# Altium PCB PIC0_D4_SD_card_T3.PcbDoc (part 2 of 2)
Units mil, origin at the board's own origin, x right, y up, seen from the top; angles counter-clockwise.
Board outline 787.38 x 1338.59 mil, 2 copper layers (Top Layer, Bottom Layer), stack 65.792 mil thick; 52 components, 65 nets, 236 pads, 240 vias.
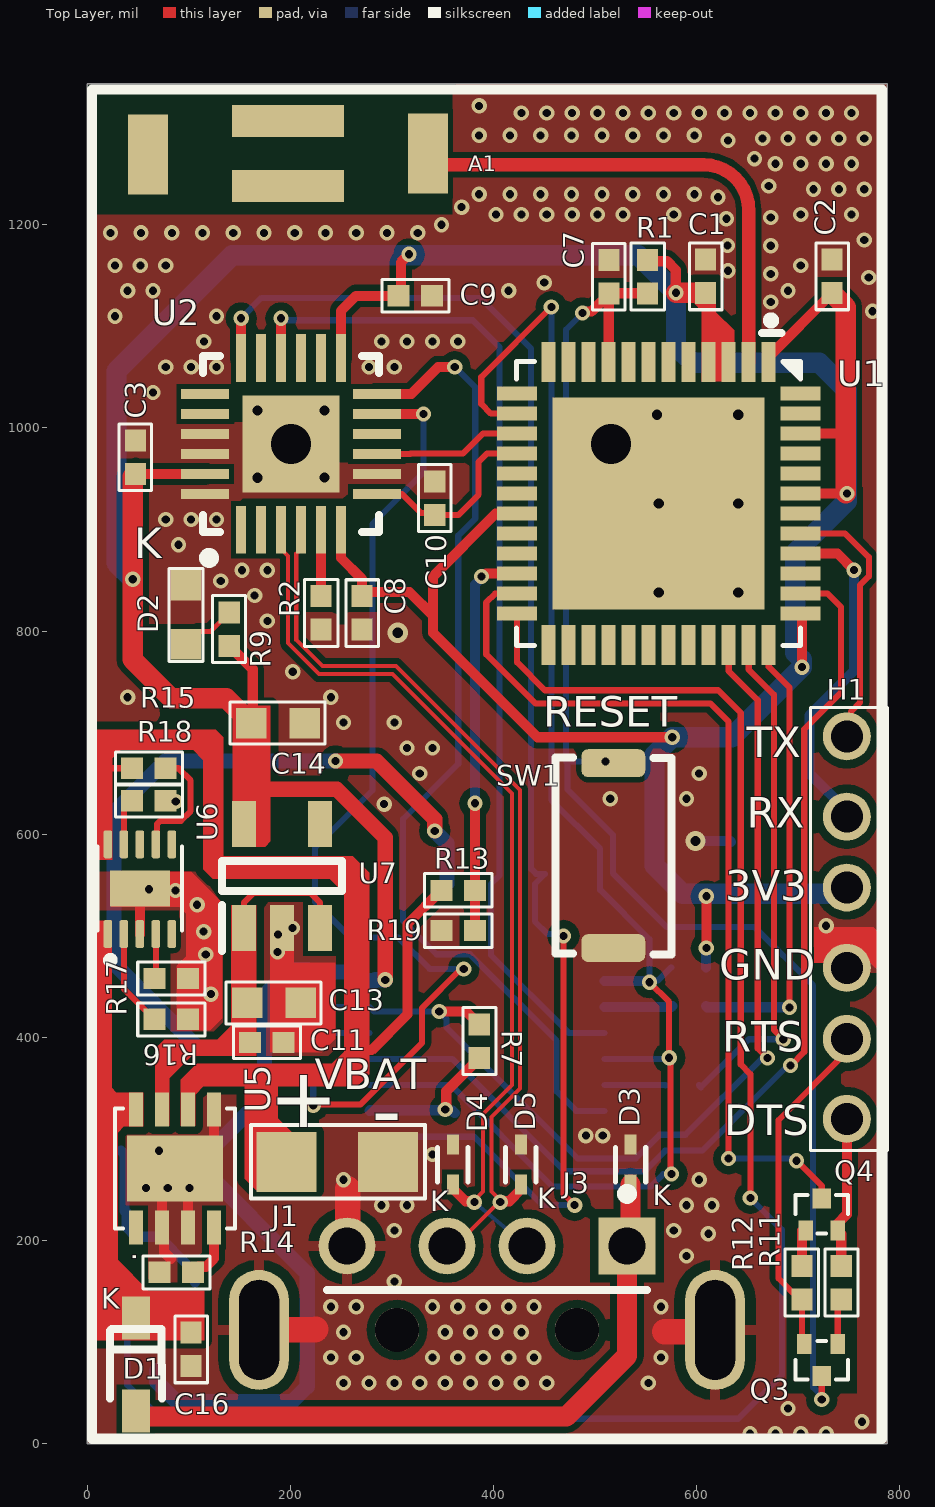
[diagram p0: Top Layer view]

## Via types
v1: diameter 15, hole 8, Top Layer to Bottom Layer, tented both sides, 227 vias
v2: diameter 20, hole 10, Top Layer to Bottom Layer, tented both sides, 12 vias
v3: diameter 15, hole 8, Top Layer to Bottom Layer, 1 vias

## Nets (pads, with @x,y where several pads share a name; then routed paths per layer and width w, separated by ;. In a path a pad name is that pad's centre, name@x,y a point inside that pad or via, vN(x,y) a via of type N, cw(c..) or ccw(c..) an arc to the next point about the centre after c; other vN are vias at no path point) (continued)
GND: (continued)
  other v1: 652.52,9.95 677.52,9.95 702.52,9.95 727.52,9.95 762.76,21.82 690.02,34.95 252.52,59.95 277.52,59.95 302.52,59.95 327.52,59.95 352.52,59.95 377.52,59.95 402.52,59.95 427.52,59.95 452.52,59.95 552.52,59.95 240.02,84.95 265.02,84.95 340.02,84.95 365.02,84.95 390.02,84.95 415.02,84.95 440.02,84.95 565.02,84.95 252.52,109.95 352.52,109.95 377.52,109.95 402.52,109.95 427.52,109.95 240.02,134.95 265.02,134.95 340.02,134.95 365.02,134.95 390.02,134.95 415.02,134.95 440.02,134.95 565.02,134.95 302.52,159.95 590.02,184.95 611.58,206.9 302.52,209.95 577.52,209.95 290.02,234.95 315.02,234.95 590.02,234.95 615.02,234.95 58,252 79.5,252 101,252 252.52,259.95 602.52,259.95 340.02,284.95 70.85,288.57 490.97,303.42 507.66,303.42 121.9,442.7 116.9,481.6 187.6,484.3 188.1,501.5 114.8,504.2 202.1,507.8 727.52,509.95 108.4,530.7 87.2,544.7 61.2,545.9 292.45,629.69 515.02,634.95 590.02,634.95 327.52,659.95 602.52,659.95 315.02,684.95 340.02,684.95 252.52,709.95 302.52,709.95 40.02,734.95 240.02,734.95 202.52,759.95 177.52,809.95 165.02,834.95 131.64,849.31 152.52,859.95 177.52,859.95 90.02,884.95 77.52,909.95 102.52,909.95 127.52,909.95 65.02,1034.95 77.52,1059.95 102.52,1059.95 127.52,1059.95 277.52,1059.95 302.52,1059.95 115.02,1084.95 290.02,1084.95 315.02,1084.95 340.02,1084.95 365.02,1084.95 27.52,1109.95 127.52,1109.95 773.12,1114.82 673,1124 40.02,1134.95 65.02,1134.95 415.02,1134.95 690.02,1134.95 450,1143 769.41,1148 673,1151.67 630.88,1154.7 27.52,1159.95 52.52,1159.95 77.52,1159.95 702.52,1159.95 673,1179.33 630.51,1179.67 765.02,1184.95 23,1192 53.25,1192 83.5,1192 113.75,1192 144,1192 174.25,1192 204.5,1192 234.75,1192 265,1192 295.25,1192 325.5,1192 349,1200 629.26,1205.91 673,1207 402.52,1209.95 427.52,1209.95 452.52,1209.95 477.52,1209.95 502.52,1209.95 527.52,1209.95 577.52,1209.95 702.52,1209.95 752.52,1209.95 368.75,1217.28 621,1227 386,1230 416.25,1230 446.5,1230 476.75,1230 507,1230 537.25,1230 567.5,1230 597.75,1230 715.02,1234.95 740.02,1234.95 765.02,1234.95 671,1238 677.52,1259.95 702.52,1259.95 727.52,1259.95 752.52,1259.95 657,1265 631,1283 665.02,1284.95 690.02,1284.95 715.02,1284.95 740.02,1284.95 765.02,1284.95 386,1288 416.25,1288 446.5,1288 476.75,1288 507,1288 537.25,1288 567.5,1288 597.75,1288 427.52,1309.95 452.52,1309.95 477.52,1309.95 502.52,1309.95 527.52,1309.95 552.52,1309.95 577.52,1309.95 602.52,1309.95 627.52,1309.95 652.52,1309.95 677.52,1309.95 702.52,1309.95 727.52,1309.95 752.52,1309.95 386,1317
  other v2: 305.86,798.37 562.7,838.1 641,838.1 562.7,925.55 641,925.55 167.79,951 233.79,951.21 561,1013 641,1013 167.79,1017.21 233.79,1017.21
IO12: U1.18
IO13: U1.20
IO14: U1.17
IO15: U1.21
IO21: U1.42
IO22: U1.39
IO32: U1.12
IO33: U1.13
IO34: U1.10
IO35: U1.11
IO37: U1.6
IO38: U1.7
LNA_IN: A1.1 U1.2 | length 496.8
  Top Layer w13: A1.1 ccw(c346.8,1270) 346.8,1259 607,1259 cw(c607,1214.72) 651.28,1214.72 U1.2
NetD1_2: D1.2 D3.1 J3.1 | length 678.1
  Top Layer w20: D1.2@48.21,26.9 471.6,26.9 531.5,86.8 J3.1 535,198.39 D3.1
NetD2_1: D2.1 R9.2 | length 56
  Top Layer w5: D2.1 109.7,799.78 121.68,799.78 140,818.1 R9.2
NetQ2_2: Q2.2 R10.1 U4.3 | length 173.7
  Bottom Layer w10: U4.3 36.8,285.22 36.8,229.41 38.1,228.12 R10.1 38.88,228.12 38.88,213.08 48.07,203.89 71.05,203.89 99.35,175.59 106.16,168.78 Q2.2
NetQ3_1: Q3.1 R11.2 | length 47.4
  Top Layer w6: Q3.1 R11.2@738.88,142.36
  Top Layer w10: R11.2@738.88,142.36 R11.2
NetQ4_1: Q4.1 R12.2 | length 38.6
  Top Layer w10: R12.2 703.62,210.23 Q4.1
NetR2_1: R2.1 U2.5 | length 65.3
  Top Layer w10: R2.1 U2.5
NetR4_1: R4.1 U3.2 | length 67.2
  Bottom Layer w10: U3.2 575.39,430.18 R4.1
NetR5_2: R5.2 U3.12 | length 62.7
  Bottom Layer w6: R5.2 222.33,404.59 U3.12
NetR6_1: R6.1 U3.5 | length 60
  Bottom Layer w6: U3.5 568.8,353.41 R6.1
NetR7_2: R7.2 U3.9 | length 151.3
  Top Layer w10: v1(352.66,329.09) 353.62,330.05 353.62,347.23 386,379.61 R7.2
  Bottom Layer w10: U3.9 278.67,328.45 350.99,328.45 352.66,326.78 354.02,328.13 359.45,328.13 362,325.59
NetR14_1: R14.1 U5.4 | length 56.6
  Top Layer w10: R14.1 109.93,174.43 117.05,174.43 124.97,182.36 U5.4
NetR15_1: R15.1 U6.7 | length 118.8
  Top Layer w6: U6.7@67.75,589.63 69.08,590.96 69.08,610.2 72.11,613.23 92.36,613.23 101.89,622.76 101.89,653.14 90.03,665 R15.1
NetR16_2: R16.2 U6.2 | length 96.1
  Top Layer w6: U6.2@36.25,501.37 36.25,447.86 66.11,418 R16.2
NetR17_1: R17.1 U6.4 | length 43.9
  Top Layer w6: R17.1 67.75,459.24 U6.4@67.75,501.37
NetR18_1: R18.1 U6.9 | length 47
  Top Layer w6: U6.9@36.25,589.63 36.25,625.14 44.11,633 R18.1
OUT: C11.2 C13.1 U5.7 U7.1 U7.3 | length 134.7
  Top Layer w6: U7.1 154.6,533 163.7,542.1 220,542.1 229.4,532.7 U7.3
  Top Layer w10: 157,471 158.51,469.49
RTS: H1.2 Q3.2 R12.1 | length 341.1
  Top Layer w6: Q3.2 703.62,98.48 R12.1 701.21,142.36 680.75,162.82 680.75,318.84 747.88,385.98 H1.2
RX: U1.28
RXD0: H1.5 U1.40 | length 341.9
  Top Layer w10: U1.40 738.66,876.34 v1(755,860)
  Bottom Layer w10: H1.5@748.55,611.58 748.55,622.64 711,660.19 711,717 755,761 v1(755,860)
SD_CDZ: U1.15 U2.9 | length 146.2
  Top Layer w6: U2.9 318.37,974.37 ; 318.37,974.63 369.82,974.63 389.63,994.45 U1.15
SD_Power: Q2.1 U1.24 | length 1737.4
  Top Layer w6: U1.24 423.33,769.23 450.76,741.8 621.18,741.8 643.47,719.52 643.47,373.49 652.89,364.06 v1(652.89,242.04)
  Bottom Layer w6: Q2.1 31.36,149.09 39.58,140.87 39.58,58.14 72.9,24.81 640.98,24.81 683.93,67.76 683.93,211 v1(652.89,242.04)
SD_Reset: C10.2 U1.16 U2.7 | length 189.8
  Top Layer w6: U2.7 310,935 328.81,916.19 C10.2@342.32,916.19 ; C10.2 365.46,914.24 385.51,934.29 385.51,966.63 393.65,974.76 U1.16
SD_VDD33: C4.1 J2.4 U4.5 | length 693.6
  Top Layer w15: v1(244.5,672.1) 285.13,672.1 342.22,615.01 v1(342.22,603.28)
  Bottom Layer w15: U4.5 26.47,472.72 26.47,621.51 77.06,672.1 v1(244.5,672.1) ; v1(342.22,603.28) 354.33,591.17 J2.4
Select: R8.2 U1.14 U3.1 U3.4 U3.10 | length 1544
  Top Layer w6: U1.14 397.57,1014.13 388,1023.7 388,1050 v1(457,1119) ; v1(553.54,454.46) 573.01,434.99 v1(573.01,380.13) 574.15,378.98 574.15,266.74 v1(575.31,265.59)
  Bottom Layer w6: U3.10 358,353.41 458.04,253.37 554.97,253.37 567.2,265.59 v1(575.31,265.59) ; v1(457,1119) 457,633.65 505.03,585.62 505.03,545.38 553.54,496.88 v1(553.54,454.46) 555.26,456.18 562.05,456.18 574.85,468.98 R8.2@575.24,468.98 ; U3.4 571.88,379 v1(573.01,380.13)
  Bottom Layer w10: U3.1 v1@552.23,455.77
SENSOR_VN: U1.8
SENSOR_VP: U1.5
TX: U1.29
TXD0: H1.6 U1.41 | length 258.7
  Top Layer w6: U1.41 746.23,896.02 769.5,872.75 769.5,853.99 761.01,845.5 761.01,729.87 752.02,720.88 H1.6@752.02,698.34
USB_N: D4.1 J3.2 U2.3 | length 911.9
  Top Layer w3.98: U2.3 190.94,881.1 197.98,874.07 197.98,788.12 228.28,757.82 300.84,757.82 418.32,640.34 418.32,353.09 389.77,324.54 389.77,248.29 381.24,239.77 v1(381.24,237.95)
  Top Layer w10: D4.1 360,251.38 372.47,238.91 380.38,238.91 v1@381.24,239.77
  Bottom Layer w3.98: v1(381.24,237.95) J3.2
USB_P: D5.1 J3.3 U2.4 | length 895.1
  Top Layer w3.98: U2.4@210.8,881.07 210.6,881.07 207.7,878.17 207.7,877.97 205.95,876.23 205.95,791.42 231.58,765.79 304.15,765.79 426.29,643.65 426.29,349.78 398.23,321.72 398.23,248.29 406.76,239.77 v1(406.76,237.95) 405.27,237.95 362.2,194.88 J3.3
  Top Layer w10: v1@406.76,239.77 407.62,238.91 415.53,238.91 428,251.38 D5.1@428,255.32
VBAT: J1.1 R13.1 R15.2 U5.6 U6.10 | length 228.3
  Top Layer w6: 17,663 19,665 R15.2
  Top Layer w10: 266.12,387.6 280.18,387.6 315.42,422.84 315.42,511.69 348.56,544.83 R13.1
VDD33: C1.1 C2.1 C3.2 C8.2 C9.2 C14.1 H1.4 Q2.3 R1.1 R3.1 R8.1 R9.1 U1.1 U1.3 U1.4 U1.19 U1.37 U1.43 U1.46 U2.6 U2.13 U2.23 U3.14 U4.1 U7.5 | length 4774.4
  Top Layer w10: C3.2@47.88,954.69 U2.23 ; R9.1 163.1,762.4 163.1,710.66 C14.1 ; U2.6 250,872 270.54,851.46 270.54,838.57 317.13,838.57 340.7,815 ; U2.13 250,1115.2 264.8,1130 303.18,1130 303.18,1132.93 308.93,1132.93 308.93,1162.93 v1(317,1171) ; U1.19 402.3,915.71 340.7,854.11 340.7,815 ; R1.1 553.2,1164 571,1164 579.5,1155.5 579.5,1133.2 v1(579.7,1133) ; v1(576.01,695.57) 443.36,695.57 340.7,798.23 340.7,815 ; v1(609.6,488) v1(609.6,539.1) ; U1.1 670.97,1070.16 733.32,1132.51 C2.1 ; U1.37 703.7,815.65 v1(703.7,764.55) ; U1.43 746.76,935.39 v1(747.97,935.39) ; U1.46 746.31,994.45 746.76,994
  Top Layer w15: U7.5 U7.5@158.17,613.75 ; U7.5@158.91,614.49 158.91,625.81 177.42,644.32 245.98,644.32 293.5,596.79 v1(293.5,456.76) ; C14.1@158.91,706.47 C14.1
  Top Layer w20: C3.2@47.88,954.69 C3.2 45,951.8 v1(45,851) 45,772 83,734 137.04,734 C14.1 ; v1(579.7,1133) 608.6,1133 C1.1 ; C2.1@733.32,1132.51 746.76,1119.06 746.76,994 v1@746.76,935.39
  Bottom Layer w10: U4.1 120.97,288.57 ; R3.1@216.92,466.2 R3.1@218.72,464.4 ; R8.1 609.4,469.18 609.4,487.8 v1(609.6,488)
  Bottom Layer w15: Q2.3 68.76,60.94 88.05,41.65 202.05,41.65 216.69,56.29 216.69,167.91 108.25,276.35 U4.1 ; 120.97,288.57 174.8,342.4 174.8,442.1 198.9,466.2 R3.1@216.92,466.2 ; R3.1@218.72,464.4 263.97,464.4 272.6,455.77 U3.14 280.4,453.4 283.76,456.76 v1(293.5,456.76) ; v1@316.61,1169.99 317,1170.38 v1(317,1171)
  Bottom Layer w20: v1(45,851) 29,867 29,1056 142.99,1169.99 316.61,1169.99 542.72,1169.99 v1(579.7,1133) 579.7,1080.3 596,1064 720.95,1064 747.97,1036.97 v1(747.97,935.39) 747.97,927.9 697,876.93 697,778.7 703.7,772 v1(703.7,764.55) 634.72,695.57 v1(576.01,695.57) 558.61,678.17 558.61,569.15 586.3,541.46 741.73,541.46 H1.4
pads on no net: A1.2 A1.3 A1.4 J2.1 J2.8 J2.9 J3. U1.26 U1.44 U1.45 U1.47 U1.48 U2.1 U2.2 U2.10 U2.14 U2.15 U2.17 U2.19 U2.20 U4.4 U5.1 U6.5 U6.6 U6.8 U7.4

## Polygon pours and split planes (outlines as drawn)
GND on Top Layer "Top Layer-GND" (solid, pour order 4): 0,0 0,1338.58 787.4,1338.58 787.4,0
GND on Bottom Layer "Bottom Layer-GND" (solid, pour order 6): 787.4,0 787.4,1338.58 0,1338.58 0,0

## Other copper
Top Layer:
  pour cut-out: 0,1338.58 354.33,1338.58 cw(c354.33,1332.91) 360,1332.91 360,1210 0,1210
  pour cut-out: 0,563 3.62,563 3.62,525.23 0,525.23
  pour cut-out: 335.37,1033.8 350.35,1048.78 378.32,1048.78 390.1,1037 390.1,1008.63 365.28,983.81 318.37,983.81 318.37,997.97 313.82,1002.52
  pour cut-out: 351.92,849.47 351.92,806.11 381.55,776.48 384.37,779.31 384.37,837.59
  pour cut-out: 145.18,1039.63 256.82,1039.63 256.82,1005.61 145.44,1005.61
  pour cut-out: 153.31,930.7 254.34,930.7 254.34,902.32 153.53,902.31
  pour cut-out: 256.82,1005.61 247.67,1005.61 247.67,965.53 256.43,965.53
  pour cut-out: 259.92,925.08 326.88,925.08 326.88,848.94 280.91,848.94 280.91,855.75 261.22,855.75 261.22,876.65
  pour cut-out: 245.75,806.41 255.11,806.41 255.11,818.57 253.32,816.78 245.75,816.78
  pour cut-out: 742.33,367.45 742.33,342.42 715.88,342.42 715.88,339.59
  pour cut-out: 564.89,706.79 564.89,719.65 448,719.65 448,706.79
  pour cut-out: 77.2,807.28 61.31,807.28 61.31,769.94 77.2,769.94
  region net GND: 715.55,473.61 771.14,473.61 781.14,463.61 781.14,501.09 773.84,508.39 715.55,508.39
  pour cut-out: 71.46,722.46 76.24,717.69 83,717.69 76.43,711.12 71.6,711.12
  pour cut-out: 60.68,158.57 60.09,158.57 60.09,191.21 38.24,191.21 38.24,184.48
  pour cut-out: 82.33,433.43 82.33,442.45 76.92,442.45 76.92,433.43
  pour cut-out: 82.33,473.43 82.33,482.45 76.92,482.45 76.92,473.43
  pour cut-out: 0,525.23 90.77,525.23 90.77,514 0,514
  pour cut-out: 0,563 107,563 107,584 0,584
  pour cut-out: 133.64,530 133.64,548.66 120.68,548.66
  region net VDD33: 637,1046 605,1046 605,1115 598,1122 598,1142 599,1143 619,1143 619,1114 637,1096
  region net VBAT: 155.2,261 167,249.2 224.7,249.2 225.3,249.8 225.3,306.3 202.2,306.3 187.9,320.6 187.9,352 266,352 278,364 278,562 261.4,578.6 134,578.6 134,695.72 126.88,703 6.4,703 2,698.6 2,584 11,575 25,575 25,675 33,683 104.39,683 114.4,672.99 114.4,565.6 123.8,556.2 176.6,556.2 238.8,556.2 253,542 253,386 241,374 108.2,374 92.5,358.3 92.5,313 106.3,313 106.3,343.9 114.4,352 155.2,352
  region net VDD33: 143.4,587.9 175.5,587.9 180.6,593 180.6,726.7 146.6,726.7 143.3,723.4
  region: 146.9,587.2
  region net GND: 23.2,563 102.7,563 132.9,532.8 132.9,418.9 121.4,407.4 88.4,407.4 88.4,470.8 97.8,480.2 97.8,521.6 90.6,528.8 23.2,528.8
  region net GND: 231,385.3 244.3,398.6 244.3,473.7 203.5,473.7 203.5,530.2 180.3,530.2 180.3,385.3
  region net OUT: 67,313 81,313 81,360 103,382 166.5,382 166.5,530 141.8,530 141.8,411.5 128.3,398 76.1,398 67,388.9
  region: 144,529
  region net EXT_5V: 2.53,101.84 115.23,101.84 115.23,150.73 60.45,150.73 30.08,181.1 30.08,306.39 36.2,312.5 55.13,312.5 55.13,345.89 28.83,345.89 24.26,350.46 24.26,515 2.53,515 2.53,342.85
  pour cut-out: 403.66,766.54 720.8,766.51 720.8,1084.67 403.66,1084.67
  pour cut-out: 763.99,942.01 763.99,882.6 746.87,882.6 746.87,943.09
  pour cut-out: 688.18,255.33 688.18,49.3 758.04,49.3 758.04,255.41
Bottom Layer:
  pour cut-out: 0,1338.58 354.33,1338.58 cw(c354.33,1332.91) 360,1332.91 360,1210 0,1210
  pour cut-out: 329.8,582.41 329.8,514.72 378.86,514.72 378.86,587.72
  pour cut-out: 543.41,418.97 543.41,368.43 676.71,368.43 676.71,417.14
  pour cut-out: 626.53,499.57 626.53,441.61 690.74,441.61 690.74,462.47
  pour cut-out: 465.49,971.65 473.06,971.65 473.06,882.7 464.42,882.7
  pour cut-out: 201.94,350.81 188.96,350.81 188.96,378.8 201.94,378.8
  region net GND: 715.55,473.61 771.14,473.61 781.14,463.61 781.14,501.09 773.84,508.39 715.55,508.39
  region net GND: 658.11,809.21
  pour cut-out: 255.21,587.92 238.3,587.92 238.3,516.53 255.21,516.53
  pour cut-out: 300.83,587.72 283.91,587.72 283.91,507.53 300.83,507.53
  pour cut-out: 569.45,156.93 569.45,237 326,235 324,157

## Silkscreen, mask and mechanical layers (free items; w line width, h text height)
Top Overlay:
  lines w5: 685.14,1065.32 702.46,1047.99
  lines w8: 664.43,1093.43 683.73,1093.43 ; 694.78,1062.75 700.71,1056.42
  lines w10: 4.93,5.06 4.93,1333 782.25,1333 782.25,5.06 4.93,5.06
  text "K" at 46.71,871.92 h30
  text "RESET" at 449,706 h30
  text "TX" at 649.22,676.06 h30
  text "RX" at 649.21,606.42 h30
  text "3V3" at 628.33,534.48 h30
  text "GND" at 622.52,456.73 h30
  text "RTS" at 625,386 h30
  text "VBAT" at 223.97,348.94 h30
  text "+" at 178.94,311.8 h60
  text "DTS" at 627,304 h30
  text "-" at 280.12,299.42 h60
  text "K" at 14,133 h20
Bottom Overlay:
  text "TX" at 706.94,690.98 h30
  text "RX" at 706.19,628.21 h25
  text "3V3" at 705.87,520.94 h25
  text "GND" at 714.03,462.09 h25
  text "RTS" at 690.65,350.62 h25 r270
  text "DTS" at 707.31,300.19 h25
Mechanical 2:
  drawing of 195 lines, arcs and shapes, not listed
  text "Drill Guide" at 1355.76,3454.62 h150
  text "Layer Stack" at 1355.76,1279.34 h150
  text "Layer" at 1434.94,1067.7 h60
  text "Name" at 1844.85,1067.7 h60
  text "Material" at 2774.6,1067.7 h60
  text "Thickness" at 3634.36,1067.7 h60
  text "Constant" at 4284.2,1067.7 h60
  text "Board Layer Stack" at 4854.06,1067.7 h60
  text "Top Overlay" at 1844.85,947.7 h60
  text "Top Solder" at 1844.85,827.7 h60
  text "Solder Resist" at 2774.6,827.7 h60
  text "0.010mm" at 3634.36,827.7 h60
  text "3.5" at 4284.2,827.7 h60
  text "1" at 1434.94,707.7 h60
  text "Top Layer" at 1844.85,707.7 h60
  text "Copper" at 2774.6,707.7 h60
  text "0.036mm" at 3634.36,707.7 h60
  text "Dielectric 1" at 1844.85,587.7 h60
  text "FR-4" at 2774.6,587.7 h60
  text "1.600mm" at 3634.36,587.7 h60
  text "4.8" at 4284.2,587.7 h60
  text "2" at 1434.94,467.7 h60
  text "Bottom Layer" at 1844.85,467.7 h60
  text "Copper" at 2774.6,467.7 h60
  text "0.036mm" at 3634.36,467.7 h60
  text "Bottom Solder" at 1844.85,347.7 h60
  text "Solder Resist" at 2774.6,347.7 h60
  text "0.010mm" at 3634.36,347.7 h60
  text "3.5" at 4284.2,347.7 h60
  text "Bottom Overlay" at 1844.85,227.7 h60
Drill Drawing:
  circle w10: c1473.88,2650.58 r33.33
  lines w10: 1440.54,2233.91 1507.21,2233.91 1473.88,2167.24 1440.54,2233.91 ; 1440.54,2333.91 1457.21,2333.91 1473.88,2317.24 1490.54,2333.91 1507.21,2333.91 1490.54,2350.58 1507.21,2367.24 1490.54,2367.24 1473.88,2383.91 1457.21,2367.24 1440.54,2367.24 1457.21,2350.58 1440.54,2333.91 ; 1440.54,2483.91 1457.21,2483.91 1457.21,2467.24 1490.54,2467.24 1490.54,2483.91 1507.21,2483.91 1507.21,2517.24 1490.54,2517.24 1490.54,2533.91 1457.21,2533.91 1457.21,2517.24 1440.54,2517.24 1440.54,2483.91 ; 1440.54,2767.24 1507.21,2767.24 1507.21,2833.91 1440.54,2833.91 1440.54,2767.24 ; 1440.54,2950.58 1473.88,2917.24 1507.21,2950.58 1473.88,2983.91 1440.54,2950.58 ; 1440.54,3067.24 1473.88,3083.91 1507.21,3067.24 1490.54,3100.58 1507.21,3133.91 1473.88,3117.24 1440.54,3133.91 1457.21,3100.58 1440.54,3067.24
  lines w15: 1380.75,2122.24 12747.52,2122.24 ; 1380.75,3172.24 12747.52,3172.24 ; 1931.63,1972.24 1931.63,3322.24 ; 2531.47,1972.24 2531.47,3322.24 ; 3631.15,1972.24 3631.15,3322.24 ; 4137.02,1972.24 4137.02,3322.24 ; 4870.82,1972.24 4870.82,3322.24 ; 6370.38,1972.24 6370.38,3322.24 ; 6960.22,1972.24 6960.22,3322.24 ; 7706.02,1972.24 7706.02,3322.24 ; 10245.24,1972.24 10245.24,3322.24 ; 11344.92,1972.24 11344.92,3322.24 ; 1380.75,1972.24 12747.52,1972.24 12747.52,3322.24 1380.75,3322.24 1380.75,1972.24
  text "Symbol" at 1470.75,3217.24 h72
  text "Count" at 1976.63,3217.24 h72
  text "Hole Size" at 2576.47,3217.24 h72
  text "Plated" at 3676.15,3217.24 h72
  text "Hole Type" at 4182.02,3217.24 h72
  text "Drill Layer Pair" at 4915.82,3217.24 h72
  text "Via/Pad" at 6415.38,3217.24 h72
  text "Pad Shape" at 7005.22,3217.24 h72
  text "Template" at 7751.02,3217.24 h72
  text "Hole Length" at 10290.24,3217.24 h72
  text "Routed Path Length" at 11389.92,3217.24 h72
  text "228" at 1976.63,3067.24 h60
  text "8.00mil (0.203mm)" at 2576.47,3067.24 h60
  text "PTH" at 3676.15,3067.24 h60
  text "Round" at 4182.02,3067.24 h60
  text "Top Layer - Bottom Layer" at 4915.82,3067.24 h60
  text "Via" at 6415.38,3067.24 h60
  text "Rounded" at 7005.22,3067.24 h60
  text "(Mixed)" at 7751.02,3067.24 h60
  text "-" at 10290.24,3067.24 h60
  text "-" at 11389.92,3067.24 h60
  text "12" at 1976.63,2917.24 h60
  text "10.00mil (0.254mm)" at 2576.47,2917.24 h60
  text "PTH" at 3676.15,2917.24 h60
  text "Round" at 4182.02,2917.24 h60
  text "Top Layer - Bottom Layer" at 4915.82,2917.24 h60
  text "Via" at 6415.38,2917.24 h60
  text "Rounded" at 7005.22,2917.24 h60
  text "v51h25m0mx0" at 7751.02,2917.24 h60
  text "-" at 10290.24,2917.24 h60
  text "-" at 11389.92,2917.24 h60
  text "6" at 1976.63,2767.24 h60
  text "31.50mil (0.800mm)" at 2576.47,2767.24 h60
  text "PTH" at 3676.15,2767.24 h60
  text "Round" at 4182.02,2767.24 h60
  text "Top Layer - Bottom Layer" at 4915.82,2767.24 h60
  text "Pad" at 6415.38,2767.24 h60
  text "Rounded" at 7005.22,2767.24 h60
  text "c120h80" at 7751.02,2767.24 h60
  text "-" at 10290.24,2767.24 h60
  text "-" at 11389.92,2767.24 h60
  text "4" at 1976.63,2617.24 h60
  text "36.22mil (0.920mm)" at 2576.47,2617.24 h60
  text "PTH" at 3676.15,2617.24 h60
  text "Round" at 4182.02,2617.24 h60
  text "Top Layer - Bottom Layer" at 4915.82,2617.24 h60
  text "Pad" at 6415.38,2617.24 h60
  text "(Mixed)" at 7005.22,2617.24 h60
  text "(Mixed)" at 7751.02,2617.24 h60
  text "-" at 10290.24,2617.24 h60
  text "-" at 11389.92,2617.24 h60
  text "2" at 1976.63,2467.24 h60
  text "39.37mil (1.000mm)" at 2576.47,2467.24 h60
  text "PTH" at 3676.15,2467.24 h60
  text "Round" at 4182.02,2467.24 h60
  text "Top Layer - Bottom Layer" at 4915.82,2467.24 h60
  text "Pad" at 6415.38,2467.24 h60
  text "Rounded" at 7005.22,2467.24 h60
  text "c0h100" at 7751.02,2467.24 h60
  text "-" at 10290.24,2467.24 h60
  text "-" at 11389.92,2467.24 h60
  text "2" at 1976.63,2317.24 h60
  text "39.37mil (1.000mm)" at 2576.47,2317.24 h60
  text "PTH" at 3676.15,2317.24 h60
  text "Slot" at 4182.02,2317.24 h60
  text "Top Layer - Bottom Layer" at 4915.82,2317.24 h60
  text "Pad" at 6415.38,2317.24 h60
  text "Rounded" at 7005.22,2317.24 h60
  text "r300_150h100_250r100m300_150p100300_100150" at 7751.02,2317.24 h60
  text "98.43mil (2.500mm)" at 10290.24,2317.24 h60
  text "59.06mil (1.500mm)" at 11389.92,2317.24 h60
  text "2" at 1976.63,2167.24 h60
  text "43.31mil (1.100mm)" at 2576.47,2167.24 h60
  text "NPTH" at 3676.15,2167.24 h60
  text "Round" at 4182.02,2167.24 h60
  text "Top Layer - Bottom Layer" at 4915.82,2167.24 h60
  text "Pad" at 6415.38,2167.24 h60
  text "Rounded" at 7005.22,2167.24 h60
  text "c110hn110m110p100110" at 7751.02,2167.24 h60
  text "-" at 10290.24,2167.24 h60
  text "-" at 11389.92,2167.24 h60
  text "256 Total" at 1976.63,2017.24 h60
  text "Slot definitions :" at 1470.75,1872.27 h60
  text "Routed Path Length" at 2503.44,1872.27 h60
  text "= Calculated from tool start centre position to tool end centre position." at 3606.11,1872.27 h60
  text "Hole Length" at 2503.44,1772.29 h60
  text "= Routed Path Length + Tool Size = Slot length as defined in the PCB layout" at 3196.24,1772.29 h60

## Dimensions
0,0 to 0.02,1338.58 on Mechanical 2
0.01,-0.03 to 787.4,-0.01 on Mechanical 2

## Text inside footprints (layer, text, board x,y; h text height)
D3: Top Overlay "K" at 557,235 h20
D4: Top Overlay "K" at 338,229 h20
D5: Top Overlay "K" at 443,232 h20